# Altium PCB PCB1.PcbDoc
Units mm, origin at the board's own origin, x right, y up, seen from the top; angles counter-clockwise.
Board outline 51.51 x 80.71 mm, 2 copper layers (Component Side, Bottom Layer), stack 0.325 mm thick; 55 components, 45 nets, 211 pads, 372 vias.
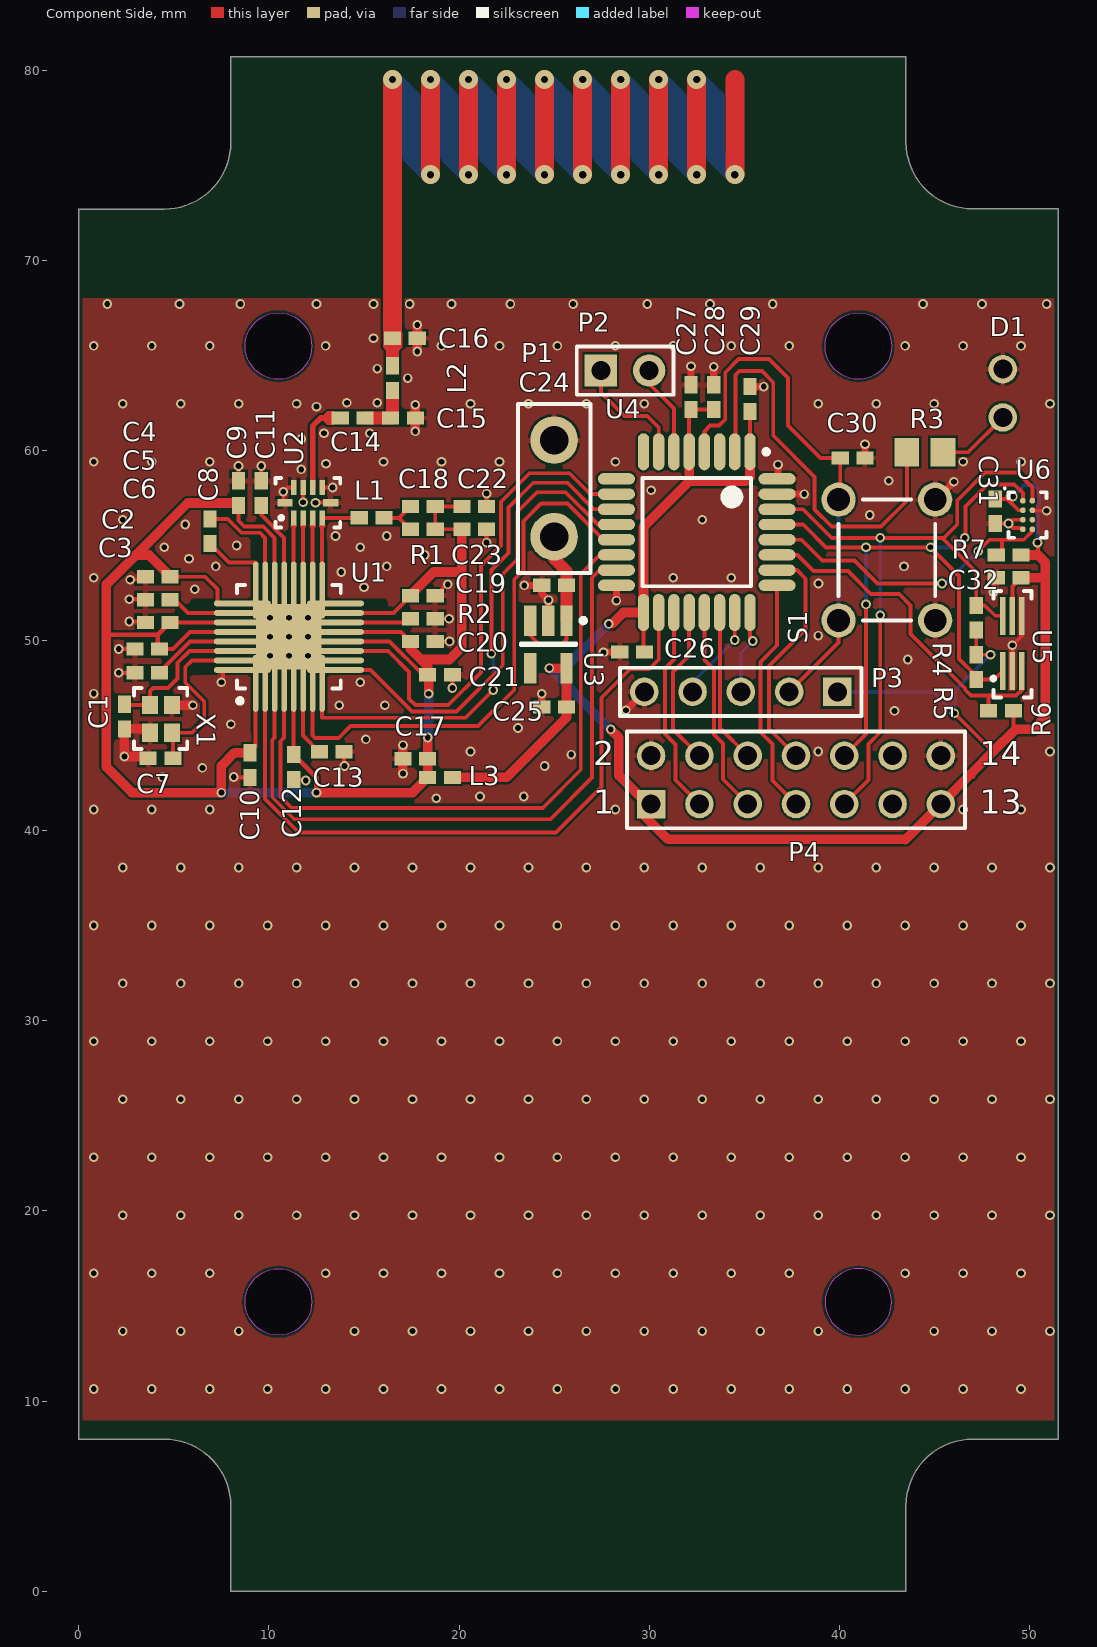
[diagram p0: Component Side view]
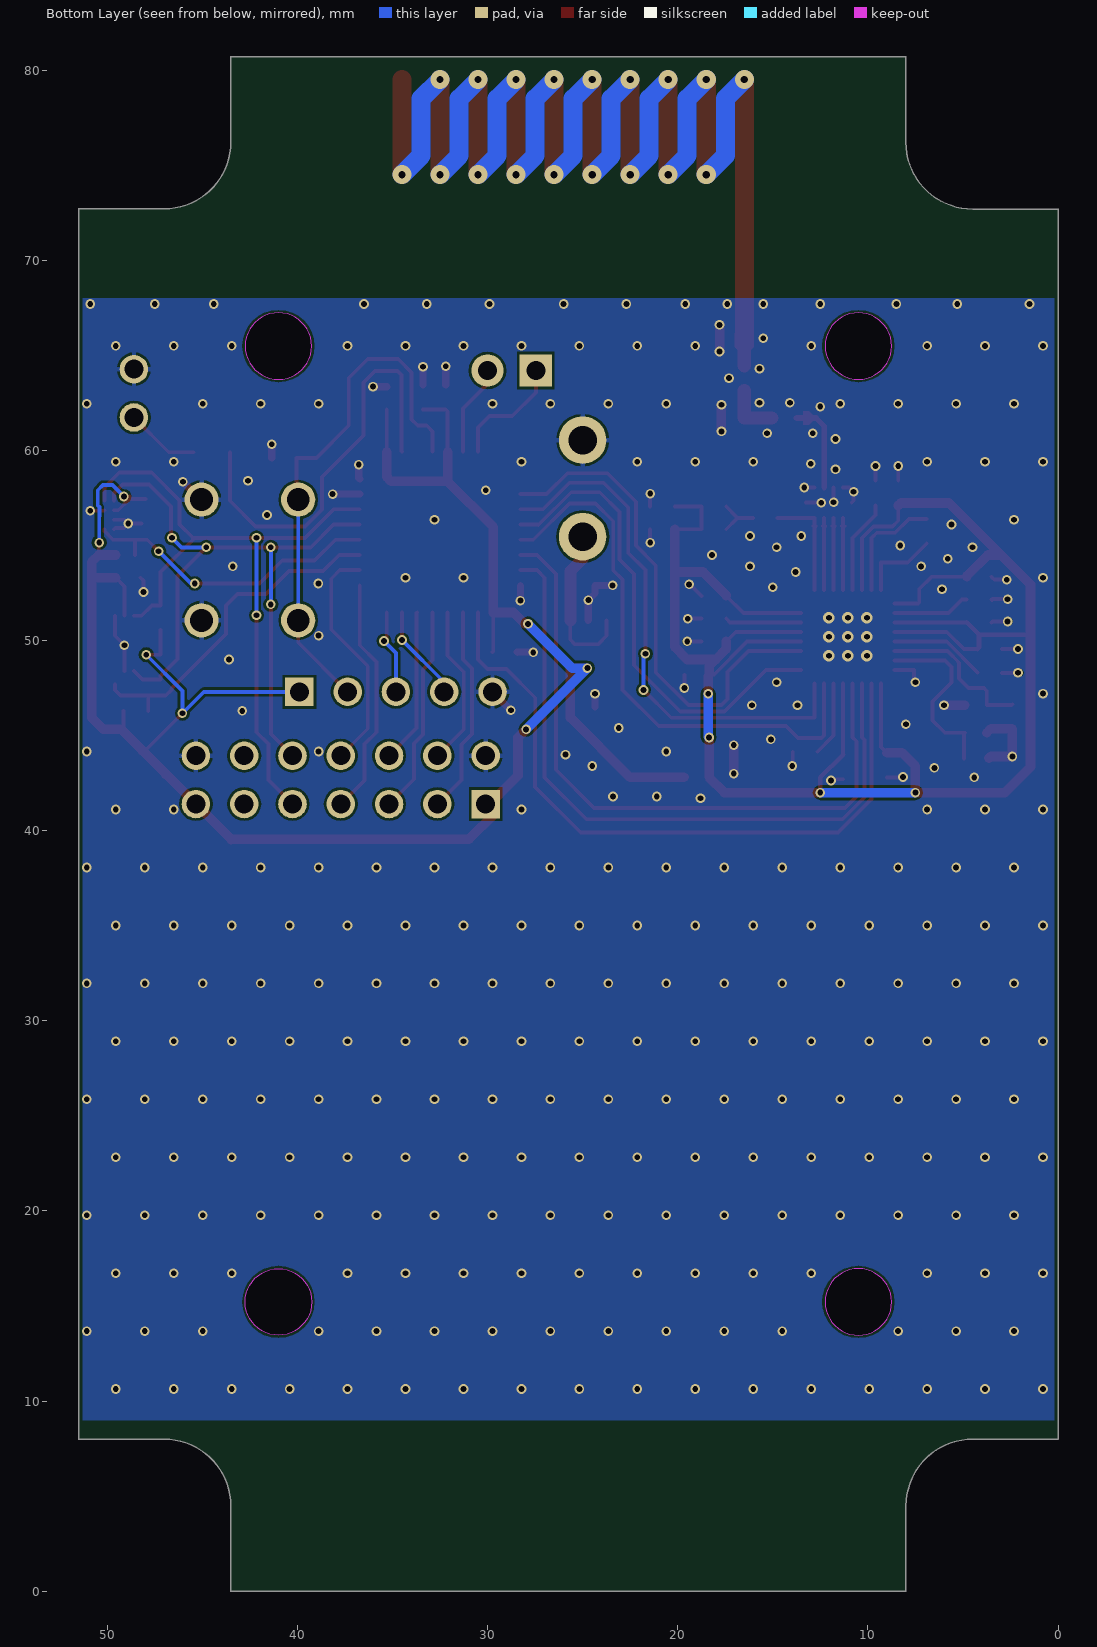
[diagram p1: Bottom Layer view, seen from below]

## Layer stack, top to bottom
Top Solder: solder mask 0.0102, Solder Resist, Dk 3.5
Component Side: signal copper 0.0356
Dielectric 1: core 0.254, FR-4, Dk 4.2
Bottom Layer: signal copper 0.0356
Solder Side: solder mask 0.0102, Solder Resist, Dk 3.5

## Board outline
7.995,0 7.995,4.49 ccw(c4.49,4.49) 4.49,7.995 0,7.995 cw(c0,8) -0.005,8 -0.005,72.685 cw(c0,72.685) 0,72.69 4.495,72.69 ccw(c4.495,76.195) 8,76.195 8,80.695 cw(c8,80.7) 8,80.705 43.5,80.705 cw(c43.5,80.7) 43.505,80.7 43.505,76.21 ccw(c47.01,76.21) 47.01,72.705 cw(c47.01,72.7) 47.015,72.7 cw(c47.01,72.7) 47.015,72.7 51.495,72.7 cw(c51.5,72.7) 51.505,72.7 51.505,8 cw(c51.5,8) 51.5,7.995 47.01,7.995 ccw(c47.01,4.49) 43.505,4.49 43.505,0 cw(c43.5,0) 43.5,-0.005 8,-0.005 cw(c8,0)
cut-out: 41,63.735 cw(c41,65.485) 39.25,65.485 cw(c41,65.485) 41,67.235 cw(c41,65.485) 42.75,65.485 cw(c41,65.485)
cut-out: 10.5,13.465 cw(c10.5,15.215) 8.75,15.215 cw(c10.5,15.215) 10.5,16.965 cw(c10.5,15.215) 12.25,15.215 cw(c10.5,15.215)
cut-out: 39.25,15.215 ccw(c41,15.215) 41,13.465 ccw(c41,15.215) 42.75,15.215 ccw(c41,15.215) 41,16.965 ccw(c41,15.215)
cut-out: 10.5,63.735 cw(c10.5,65.485) 8.75,65.485 cw(c10.5,65.485) 10.5,67.235 cw(c10.5,65.485) 12.25,65.485 cw(c10.5,65.485)

## Design rules (kind name [scope] priority, off if disabled: settings)
Clearance "Stitching GND" [IsStitchingVia and InNet('GND') vs (IsVia and (Not IsStitchingVia)) Or IsPad] p1: gap=0.254
Clearance "Stitching No Net" [IsStitchingVia and InNet('No Net') vs (IsVia and (Not IsStitchingVia)) Or IsPad] p2: gap=0.254
Clearance [All] p3: gap=0.127
HoleSize [All] p1: absolutevalues=TRUE maxlimit=2.54 minlimit=0.305 maxpercent=80.000 minpercent=20.000
MinimumSolderMaskSliver [All] p1: minsoldermaskwidth=0
NetAntennae NetAntennae_1 [InNet('NetC32_2')] p1: netantennaetolerance=900
NetAntennae [All] p2: netantennaetolerance=0
PlaneConnect [All] p1: planeconnectstyle=Relief reliefexpansion=0.508 reliefentries=4 reliefconductorwidth=0.305 reliefairgap=0.127
PolygonConnect PolygonConnect_2 [(IsVia AND InNet('GND'))] p1: connectstyle=Direct reliefconductorwidth=0.254 reliefentries=4 polygonreliefangle="90 Angle" airgapwidth=0.254
PolygonConnect PolygonConnect_1 [(InNet('GND') AND InComponent('U5'))] p2: connectstyle=Direct reliefconductorwidth=0.254 reliefentries=4 polygonreliefangle="90 Angle" airgapwidth=0.254
PolygonConnect [All] p3: connectstyle=Relief reliefconductorwidth=0.254 reliefentries=4 polygonreliefangle="90 Angle" airgapwidth=0.127
RoomDefinition RF [InComponentClass('RF')] p1: confinementstyle=ConfineIn formatcopy=TRUE lockcomponents=FALSE outline 0.2,37.6 23.425,37.6 23.425,66.8 0.2,66.8
RoomDefinition MCU [InComponentClass('MCU')] p2: confinementstyle=ConfineIn formatcopy=TRUE lockcomponents=FALSE outline 22.5,39.7 51.6,39.7 51.6,68.7 22.5,68.7
RoutingVias [All] p1: holewidth=0.381 width=0.635 viastyle="Through Hole" minholewidth=0.305 minwidth=0.508 maxholewidth=0.508 maxwidth=1.016
SolderMaskExpansion [All] p1: expansion=0.1
UnpouredPolygon [All] p1: allowunpoured=FALSE
Width [All] p1: maxlimit=1.016 minlimit=0.127 preferedwidth=0.203
25 further rules are at their usual default settings.

## Classes and differential pairs
component class MCU: C24 C25 C26 C27 C28 C29 C30 C31 C32 D1 P1 P2 P3 P4 R3 R4 R5 R6 R7 S1 U3 U4 U5 U6
component class RF: C1 C2 C3 C4 C5 C6 C7 C8 C9 C10 C11 C12 C13 C14 C15 C16 C17 C18 C19 C20 C21 C22 C23 L1 L2 L3 R1 R2 U1 U2 X1

## Components (designator, comment, footprint, x,y, rotation, side; value= is the part's Value field where it differs from the comment)
C1 "Cap" 0402_ipc 2.4,46 r90 top (schematic designator C10)
C2 "Cap" 0402_ipc 3.6,49.55 r180 top (schematic designator C16)
C3 "Cap" 0402_ipc 3.6,48.3 r0 top (schematic designator C24)
C4 "Cap" 0402_ipc 4.15,53.35 r180 top (schematic designator C18)
C5 "Cap" 0402_ipc 4.15,52.15 r0 top (schematic designator C23)
C6 "Cap" 0402_ipc 4.15,50.95 r180 top (schematic designator C17)
C7 "Cap" 0402_ipc 4.3,43.8 r0 top (schematic designator C20)
C8 "Cap" 0402_ipc 6.9,55.75 r90 top (schematic designator C26)
C9 "Cap" 0402_ipc 8.4,57.75 r90 top (schematic designator C19)
C10 "Cap" 0402_ipc 9,43.45 r270 top (schematic designator C15)
C11 "Cap" 0402_ipc 9.6,57.75 r270 top (schematic designator C25)
C12 "Cap" 0402_ipc 11.3,43.35 r270 top
C13 "Cap" 0402_ipc 13.3,44.15 r180 top (schematic designator C22)
C14 "Cap" 0402_ipc 14.4,61.7 r180 top (schematic designator C30)
C15 "Cap" 0402_ipc 17.05,61.7 r180 top (schematic designator C31)
C16 "Cap" 0402_ipc 17.15,65.9 r180 top (schematic designator C32)
C17 "Cap" 0402_ipc 17.7,43.775 r0 top (schematic designator C21)
C18 "Cap" 0402_ipc 18.1,57.05 r180 top (schematic designator C27)
C19 "Cap" 0402_ipc 18.1,52.35 r0 top (schematic designator C14)
C20 "Cap" 0402_ipc 18.1,49.95 r0 top (schematic designator C13)
C21 "Cap" 0402_ipc 19,48.2 r0 top (schematic designator C11)
C22 "Cap" 0402_ipc 20.8,57.05 r180 top (schematic designator C28)
C23 "Cap" 0402_ipc 20.8,55.85 r180 top (schematic designator C29)
C24 "Cap" 0402_ipc 25,52.9 r0 top (schematic designator C1)
C25 "Cap" 0402_ipc 25,46.5 r0 top (schematic designator C2)
C26 "Cap" 0402_ipc 29.1,49.4 r0 top (schematic designator C4)
C27 "Cap" 0402_ipc 32.2,62.8 r270 top (schematic designator C5)
C28 "Cap" 0402_ipc 33.4,62.8 r270 top (schematic designator C6)
C29 "Cap" 0402_ipc 35.3,62.7 r270 top (schematic designator C3)
C30 "Cap" 0402_ipc 40.7,59.6 r180 top (schematic designator C7)
C31 "Cap" 0402_ipc 48.2,56.8 r90 top (schematic designator C8)
C32 "Cap" 0402_ipc 48.9,53.3 r0 top (schematic designator C9)
D1 "LED" LED_5MM 48.6,63 r90 top
L1 "Inductor" 0402_ipc 15.4,56.45 r180 top (schematic designator L2)
L2 "Inductor" 0402_ipc 16.5,63.8 r90 top (schematic designator L3)
L3 "Ferrite" 0402_ipc 19,42.8 r180 top (schematic designator L1)
P1 "Battery header 2" HDR1X2 25,58 r90 top
P2 "Header 2x1" HDR1X2_100mil 30,64.2 r0 top (schematic designator P4)
P3 "Header 5" HDR1X5 39.9,47.3 r180 top
P4 "Header 7X2" HDR2X7 30.1,41.4 r0 top (schematic designator P2)
R1 "Res" 0402_ipc 18.1,55.85 r0 top (schematic designator R7)
R2 "Res" 0402_ipc 18.1,51.15 r180 top (schematic designator R6)
R3 "Res" 0805_IPC 44.5,59.9 r0 top (schematic designator R1)
R4 "Res" 0402_ipc 47.2,51.2 r270 top (schematic designator R3)
R5 "Res" 0402_ipc 47.2,48.6 r90 top (schematic designator R2)
R6 "Res" 0402_ipc 48.5,46.3 r0 top (schematic designator R5)
R7 "Res" 0402_ipc 48.9,54.5 r0 top (schematic designator R4)
S1 "SW-PB" SW_PB 42.5,53.6 r90 top
U1 "CC1120" CC1120_VQFN32 11.05,50.2 r90 top (schematic designator U5)
U2 "0900PC15J0013" 0900PC15J0013 10.75,57.25 r0 top (schematic designator U6)
U3 "LT1761MPS5-3.3#TRMPBF" LT-S5-5-TSOT-23_M 24.7,49.8 r270 top (schematic designator U1)
U4 "STM32L051K6T6" STM-LQFP32_M 32.5,55.7 r270 top (schematic designator U2)
U5 "TMP112" TMP112 48.6,51.3 r0 top (schematic designator U4)
U6 "HDC1000" HDC1000 49.9,56.6 r0 top (schematic designator U3)
X1 "FA-128" FA-128 4.9,46.6 r270 top

## Footprints (in the part's own frame and the unit in brackets; to place one, negate y for a bottom-side part, rotate by r counter-clockwise, add the part's x,y. Pads: shape width x height; smd on the part's side, far side on the other; paste and mask are expansions set on the pad)
0402_ipc [mm] "Chip Capacitor, Body 1.0x0.5mm"
  rect 0.9x0.7 smd: 1(-0.65,0) 2(0.65,0)
  body extent -0.55,-0.3 0.55,0.3, height 1.3
0805_IPC [mm] "Chip Capacitor, Body 1.0x0.5mm"
  rect 1.3x1.5 smd: 1(-0.95,0) 2(0.95,0)
  body extent -1,-0.7 1,0.7, height 1.3
0900PC15J0013 [mm] "IPC CC1120"
  rect 0.3x0.8 smd: 1(0.55,-0.8) 2(1.05,-0.8) 3(1.55,-0.8) 4(2.05,-0.8) 6(2.05,0.8) 7(1.55,0.8) 8(1.05,0.8) 9(0.55,0.8)
  rect 0.8x0.4 smd: 5(2.5,0) 10(0.1,0)
  silkscreen extent -0.4,-1.3 3,1.3, body extent 0.3,-0.67 2.3,0.67, height 1
CC1120_VQFN32 [mm] "QFN, 32-Leads, Body 5,00x5,00mm, Pitch 0,50mm, Thermal Pad 3,45x3,45mm, IPC Low Density"
  oval 3x0.3 smd: 1(-2.45,1.75) 2(-2.45,1.25) 3(-2.45,0.75) 4(-2.45,0.25) 5(-2.45,-0.25) 6(-2.45,-0.75) 7(-2.45,-1.25) 8(-2.45,-1.75) 17(2.45,-1.75) 18(2.45,-1.25) 19(2.45,-0.75) 20(2.45,-0.25) 21(2.45,0.25) 22(2.45,0.75) 23(2.45,1.25) 24(2.45,1.75)
  oval 0.3x3 smd: 9(-1.75,-2.45) 10(-1.25,-2.45) 11(-0.75,-2.45) 12(-0.25,-2.45) 13(0.25,-2.45) 14(0.75,-2.45) 15(1.25,-2.45) 16(1.75,-2.45) 25(1.75,2.45) 26(1.25,2.45) 27(0.75,2.45) 28(0.25,2.45) 29(-0.25,2.45) 30(-0.75,2.45) 31(-1.25,2.45) 32(-1.75,2.45)
  rect 3.45x3.45 smd: PAD(0,0)
  silkscreen extent -3.5,-2.73 2.73,2.73, body extent -2.58,-2.57 2.57,2.58, height 1
FA-128 [mm] "Quartz FA-128 Epson"
  rect 0.95x0.85 smd: 1(0,-1.15) 2(1.45,-1.15) 3(1.45,0) 4(0,0)
  silkscreen extent -0.9,-2 2.3,0.8, body extent -0.27,-1.37 1.73,0.23, height 0.5
HDC1000 [mm] "BGA, 8-Leads, Body 1,59x2,04mmx0,68mm, Pitch 0,50mm"
  round 0.305 smd mask+0.05: A1(-0.25,0.75) A2(0.25,0.75) B1(-0.25,0.25) B2(0.25,0.25) C1(-0.25,-0.25) C2(0.25,-0.25) D1(-0.25,-0.75) D2(0.25,-0.75)
  silkscreen extent -1.25,-1.2 1,1.45, body extent -0.79,-1.02 0.8,1.02, height 0.68
HDR1X2 [mm] "Connector; Header; 2 Position"
  round 2.5 hole 1.5: 1(-2.54,0) 2(2.54,0)
  silkscreen extent -4.44,-1.91 4.44,1.91
HDR1X2_100mil [mm] "Connector; Header; 2 Position"
  rect 1.7x1.7 hole 1: 1(-2.54,0)
  round 1.7 hole 1: 2(0,0)
  silkscreen extent -3.81,-1.27 1.27,1.27
HDR1X5 [mm] "Connector; Header; 5 Position"
  rect 1.5x1.5 hole 1: 1(0,0)
  round 1.5 hole 1: 2(2.54,0) 3(5.08,0) 4(7.62,0) 5(10.16,0)
  silkscreen extent -1.27,-1.27 11.43,1.27
HDR2X7 [mm] "Connector; Header; 7x2 Position"
  rect 1.5x1.5 hole 1: 1(0,0)
  round 1.5 hole 1: 2(0,2.54) 3(2.54,0) 4(2.54,2.54) 5(5.08,0) 6(5.08,2.54) 7(7.62,0) 8(7.62,2.54) 9(10.16,0) 10(10.16,2.54) 11(12.7,0) 12(12.7,2.54) 13(15.24,0) 14(15.24,2.54)
  silkscreen extent -1.27,-1.27 16.51,3.81
LED_5MM [mm]
  round 1.5 hole 1: 1(-1.27,0) 2(1.27,0)
LT-S5-5-TSOT-23_M [mm] "SOT23, 5-Leads, Body 2.90x1.63mm, Pitch 0.95mm, IPC Low Density"
  rect 1.6x0.65 smd: 1(-1.25,0.95) 2(-1.25,0) 3(-1.25,-0.95) 4(1.25,-0.95) 5(1.25,0.95)
  silkscreen extent -1.37,-1.45 0.05,1.95, body extent -0.87,-1.45 0.87,1.45, height 1
STM-LQFP32_M [mm] "QFP, 32-Leads, Body 7x7mm, Pitch 0.8mm, IPC Low Density"
  oval 1.95x0.6 smd: 1(-4.225,2.8) 2(-4.225,2) 3(-4.225,1.2) 4(-4.225,0.4) 5(-4.225,-0.4) 6(-4.225,-1.2) 7(-4.225,-2) 8(-4.225,-2.8) 17(4.225,-2.8) 18(4.225,-2) 19(4.225,-1.2) 20(4.225,-0.4) 21(4.225,0.4) 22(4.225,1.2) 23(4.225,2) 24(4.225,2.8)
  oval 0.6x1.95 smd: 9(-2.8,-4.225) 10(-2,-4.225) 11(-1.2,-4.225) 12(-0.4,-4.225) 13(0.4,-4.225) 14(1.2,-4.225) 15(2,-4.225) 16(2.8,-4.225) 25(2.8,4.225) 26(2,4.225) 27(1.2,4.225) 28(0.4,4.225) 29(-0.4,4.225) 30(-1.2,4.225) 31(-2,4.225) 32(-2.8,4.225)
  silkscreen extent -4.35,-2.85 2.85,3.78, body extent -3.5,-3.5 3.5,3.5, height 1.6
SW_PB [mm]
  round 1.8 hole 1.2: 1(-2.54,2.54) 1(3.81,2.54) 2(-2.54,-2.54) 2(3.81,-2.54)
  silkscreen extent -2.54,-2.54 3.81,2.54
TMP112 [mm]
  rect 0.3x2 smd mask+0.05: 1(0,-2.9) 2(0.5,-2.9) 3(1,-2.9) 4(1,0) 5(0.5,0) 6(0,0)
  silkscreen extent -0.6,-4.3 1.5,1.3, body extent -0.15,-2.3 1.15,-0.6, height 0.7

## Part data
C1 C2 C3 C4 C5 C6 C7 C8 C9 C10 C11 C12 C13 C14 C15 C16 C17 C18 C19 C20 C21 C22 C23 C24 C25 C26 C27 C28 C29 C30 C31 C32: "Capacitor"
D1: "Typical INFRARED GaAs LED"
L3: library part Inductor, "Inductor"
P3: "Header, 5-Pin"
P4: "Header, 7-Pin, Dual row"
R1 R2 R3 R4 R5 R6 R7: "Resistor"
S1: "Switch"
U3: library part CMP-0476-01317-1, "100 mA, Low Noise, LDO Micropower Regulator, 1.8 to 20 V Vin, 3.3 V Vout, 5-pin SOT23 (S5-5), -55 to 125 degC, Pb-Free, Mini Tape and Reel"
U4: library part CMP-1341-00001-1, "Access Line Ultra-Low-Power ADC, 32 Bit MCU ARM, 32 kB Flash, 8 kB SRAM, 2 kB EEPROM, -40 to 85 degC, 32-Pin LQFP, Tray"
X1: "Quartz 32 MHz"

## Via types
v1: diameter 0.508, hole 0.305, Component Side to Bottom Layer, tented both sides, 345 vias
v2: diameter 1, hole 0.38, Component Side to Bottom Layer, tented both sides, 18 vias
v3: diameter 0.61, hole 0.305, Component Side to Bottom Layer, tented both sides, 9 vias

## Nets (pads, with @x,y where several pads share a name; then routed paths per layer and width w, separated by ;. In a path a pad name is that pad's centre, name@x,y a point inside that pad or via, vN(x,y) a via of type N, cw(c..) or ccw(c..) an arc to the next point about the centre after c; other vN are vias at no path point)
+3V3: C25.2 C26.2 C27.2 C28.2 C29.2 C31.2 C32.2 L3.1 P3.1 P4.1 P4.13 R4.2 R5.2 R6.2 R7.2 U3.5 U4.1 U4.5 U4.17 U5.5 U6.B1 | length 110.1
  Component Side w0.203: U4.17 29.7,49.45 C26.2 ; U4.5 32.1,62.05 C27.2 C28.2 ; U4.1 C29.2@35.3,62.15 ; v1(46.05,46.175) 48.02,44.205 48.145,44.205 ; 46.911,42.971 47.05,42.833 ; R4.2 R5.2 v1(47.95,49.25) ; C31.2@48,57.45 C31.2 48.823,57.45 ; U5.5 49.1,52.85 C32.2 ; v1(49.127,57.578) 48.823,57.578 48.823,57.45 ; 49.15,45.375 R6.2 ; U6.B1 49.423,56.85 48.823,57.45 ; v1(50.425,55.15) 50.45,55.125 50.45,54.5
  Component Side w0.508: L3.1 22.5,42.8 25.65,45.95 U3.5 v1(24.75,48.55) ; v1(27.875,50.875) 28.038,50.875 28.638,51.475 U4.17 29.7,55.975 32.1,58.375 ; v1(27.975,45.325) 28.4,44.9 28.4,42.9 29.611,41.689 29.611,40.911 30.972,39.55 43.475,39.55 43.475,39.535 P4.13 46.911,42.971 48.145,44.205 49.265,45.325 50.2,45.325 50.825,45.95 50.825,53.325 ; U4.5 32.1,58.375 ; U4.1 35.3,58.6 35.075,58.375 32.1,58.375 ; C32.2 50.8,53.3 50.825,53.325 ; R7.2 50.45,54.5 50.825,54.125 50.825,53.325
  Bottom Layer w0.203: P3.1 44.925,47.3 v1(46.05,46.175) 46.05,47.35 v1(47.95,49.25) ; v1(49.127,57.578) 49.13,57.575 49.73,58.175 50.225,58.175 50.5,57.9 50.5,57.107 50.417,57.025 50.417,56.543 50.425,56.535 v1(50.425,55.15)
  Bottom Layer w0.508: v1(27.875,50.875) 25.55,48.55 v1(24.75,48.55) v1(27.975,45.325)
+3V3RF: C2.1 C4.1 C6.1 C9.1 C10.1 C12.1 C17.2 C18.1 C19.1 C20.1 C21.1 C22.2 C23.2 L3.2 R1.2 U1.1 U1.5 U1.12 U1.13 U1.15 U1.22 U1.25 U1.27 U1.28 | length 112.4
  Component Side w0.203: C2.1 4.95,49.55 5.85,50.45 U1.28 ; C6.1 U1.27 ; C4.1 6.65,53.35 7.3,52.7 7.3,52 7.35,51.95 U1.25 ; C9.1 8.4,56.3 8.7,56 9.7,56 10.3,55.4 U1.22 ; C10.1 9.3,44.4 U1.1 ; C12.1 U1.5 ; U1.12 16.35,49.95 C21.1@18.1,48.2 ; U1.13 16.95,50.45 C20.1 ; U1.15 16.55,51.45 C19.1 ; C23.2 R1.2 C18.1 C22.2
  Component Side w0.254: 1.5,50.3 4.15,50.3 ; C2.1 4.15,49.65 4.15,50.3 ; C6.1 4.15,50.3 ; C12.1 12.5,42.8 v1(12.5,42)
  Component Side w0.508: C4.1 4.8,53.389 3.689,54.5 3,54.5 ; C9.1 8.269,57.231 5.731,57.231 3,54.5 ; C10.1 8.2,44.1 7.5,43.4 v1(7.5,42) 2.8,42 1.45,43.35 1.45,52.95 3,54.5 ; v1(12.5,42) 17.55,42 L3.2 v1(18.35,44.9) ; C20.1 17.45,49.55 18,49 ; C19.1 17.45,52.389 18.661,53.6 20.15,53.6 ; v1(18.4,47.2) 18.4,48.15 C21.1 18.35,48.65 18,49 ; C23.2 20.15,53.6 ; 18,49 19.5,49 20.15,49.65 20.15,53.6
  Bottom Layer w0.508: v1(7.5,42) v1(12.5,42) ; v1(18.35,44.9) 18.4,44.95 v1(18.4,47.2)
+VBAT: C24.2 P1.1 U3.1 U3.3 | length 8.7
  Component Side w0.203: U3.3 23.75,50.25 24.2,49.8 25.4,49.8 25.65,50.05 U3.1
  Component Side w0.635: P1.1 25,54.3 25.65,53.65 C24.2 U3.1
ADC_IN0: P4.7 U4.25 | length 12.6
  Component Side w0.203: U4.25 36.725,49.75 35.849,48.874 35.849,45.176 36.475,44.55 36.475,42.645 P4.7
GND: C1.1 C2.2 C3.1 C4.2 C5.1 C6.2 C7.1 C9.2 C10.2 C11.1 C12.2 C13.1 C15.1 C16.1 C17.1 C19.2 C20.2 C21.2 C22.1 C23.1 C24.1 C25.1 C26.1 C27.1 C28.1 C29.1 C30.1 C31.1 C32.1 D1.2 P1.2 P3.5 P4.2 P4.14 R2.1 S1.2 U1.32 U1.PAD U2.5 U2.6 U2.8 U2.9 U2.10 U3.2 U4.16 U4.31 U4.32 U5.2 U5.4 U6.B2 U6.C1 U6.D1 X1.2 X1.4 | length 48.3
  Component Side w0.203: v1(2.1,48.302) 2.102,48.3 C3.1 ; v1(2.1,49.552) 2.103,49.55 C2.2 ; v1(2.65,51.002) 2.653,51 3.45,51 C6.2 ; v1(2.65,52.175) 3.425,52.175 3.475,52.125 C5.1 ; v1(2.7,53.2) 3.35,53.2 C4.2 ; v1(7.5,47.8) 7.577,47.877 7.577,48.45 U1.32 ; v1(8.15,42.825) 8.175,42.8 C10.2 ; C9.2 v1(8.4,59.175) ; C11.1 v1(9.6,59.175) ; U2.10 10.75,57.35 v1(10.75,57.825) 10.975,58.05 U2.9 ; C12.2 12,42.7 v1(11.941,42.641) ; v1(11.8,57.275) U2.8 ; v1(12.45,57.25) U2.5 ; U2.6 v1(13.35,58.05) ; C13.1 13.95,43.425 v1(13.975,43.4) ; C20.2 19.499,49.95 v1(19.501,49.952) ; R2.1 v1(19.475,51.15) ; C19.2 19.4,53 v1(19.401,52.953) v1(19.401,52.953) ; v1(19.65,47.5) C21.2 ; v1(21.45,55.15) C23.1 ; C22.1 v1(21.45,57.725) ; v1(48.1,52.55) 48.1,53.15 C32.1 ; C31.1 v1(48.9,56.15) ; U5.2 v1(49.1,49.75) 49.6,50.25 U5.4 ; U6.D1 49.575,55.925 49.125,55.925 v1(48.9,56.15) ; U6.C1 49.1,56.35 v1(48.9,56.15) ; U6.B2 50.175,56.825 v1(50.9,56.825)
  Component Side w0.381: v1(23.425,52.9) C24.1 24.35,52.475 v1(24.7,52.125) U3.2 ; C25.1 v1(24.35,47.2) ; v1@27.625,49.4 C26.1 C26.1@28.425,49.375 ; v1(28.275,52.1) U4.16 ; v1(28.775,46.335) P3.5 ; C27.1 v1(32.2,64.425) ; C28.1 v1(33.4,64.4) ; C29.1 36.024,63.35 v1(36.027,63.353) ; U4.31 v1(38.15,57.7) ; U4.32 36.775,58.55 v1(36.775,59.25) ; C30.1 v1(41.35,60.325) ; S1.2@45.04,57.41 45.085,57.41 v1(46.025,58.35)
  Component Side w0.5: C7.1 3.55,43.9 v1(2.4,43.9) C1.1 3.55,45.35 X1.2 ; X1.4 v1(6,46.6) ; v1(17.05,43) C17.1 v1(17.05,44.5) ; v1(17.7,61) C15.1 v1(17.7,62.4) ; v1(17.8,65.2) C16.1 v1(17.8,66.6)
  Bottom Layer w0.203: v1@2.048,48.302 v1(2.1,48.302) ; v1@2.077,49.552 v1(2.1,49.552) ; v1@2.623,51.002 v1(2.65,51.002) ; v1(19.501,49.952) v1@19.523,49.952
  other v1: 0.788,10.632 3.836,10.632 6.884,10.632 9.932,10.632 12.98,10.632 16.028,10.632 19.076,10.632 22.124,10.632 25.172,10.632 28.22,10.632 31.268,10.632 34.316,10.632 37.364,10.632 40.412,10.632 43.46,10.632 46.508,10.632 49.556,10.632 2.312,13.68 5.36,13.68 8.408,13.68 14.504,13.68 17.552,13.68 20.6,13.68 23.648,13.68 26.696,13.68 29.744,13.68 32.792,13.68 35.84,13.68 38.888,13.68 44.984,13.68 48.032,13.68 51.08,13.68 0.788,16.728 3.836,16.728 6.884,16.728 12.98,16.728 16.028,16.728 19.076,16.728 22.124,16.728 25.172,16.728 28.22,16.728 31.268,16.728 34.316,16.728 37.364,16.728 43.46,16.728 46.508,16.728 49.556,16.728 2.312,19.776 5.36,19.776 8.408,19.776 11.456,19.776 14.504,19.776 17.552,19.776 20.6,19.776 23.648,19.776 26.696,19.776 29.744,19.776 32.792,19.776 35.84,19.776 38.888,19.776 41.936,19.776 44.984,19.776 48.032,19.776 51.08,19.776 0.788,22.824 3.836,22.824 6.884,22.824 9.932,22.824 12.98,22.824 16.028,22.824 19.076,22.824 22.124,22.824 25.172,22.824 28.22,22.824 31.268,22.824 34.316,22.824 37.364,22.824 40.412,22.824 43.46,22.824 46.508,22.824 49.556,22.824 2.312,25.872 5.36,25.872 8.408,25.872 11.456,25.872 14.504,25.872 17.552,25.872 20.6,25.872 23.648,25.872 26.696,25.872 29.744,25.872 32.792,25.872 35.84,25.872 38.888,25.872 41.936,25.872 44.984,25.872 48.032,25.872 51.08,25.872 0.788,28.92 3.836,28.92 6.884,28.92 9.932,28.92 12.98,28.92 16.028,28.92 19.076,28.92 22.124,28.92 25.172,28.92 28.22,28.92 31.268,28.92 34.316,28.92 37.364,28.92 40.412,28.92 43.46,28.92 46.508,28.92 49.556,28.92 2.312,31.968 5.36,31.968 8.408,31.968 11.456,31.968 14.504,31.968 17.552,31.968 20.6,31.968 23.648,31.968 26.696,31.968 29.744,31.968 32.792,31.968 35.84,31.968 38.888,31.968 41.936,31.968 44.984,31.968 48.032,31.968 51.08,31.968 0.788,35.016 3.836,35.016 6.884,35.016 9.932,35.016 12.98,35.016 16.028,35.016 19.076,35.016 22.124,35.016 25.172,35.016 28.22,35.016 31.268,35.016 34.316,35.016 37.364,35.016 40.412,35.016 43.46,35.016 46.508,35.016 49.556,35.016 2.312,38.064 5.36,38.064 8.408,38.064 11.456,38.064 14.504,38.064 17.552,38.064 20.6,38.064 23.648,38.064 26.696,38.064 29.744,38.064 32.792,38.064 35.84,38.064 38.888,38.064 41.936,38.064 44.984,38.064 48.032,38.064 51.08,38.064 0.788,41.112 3.836,41.112 6.884,41.112 28.22,41.112 46.508,41.112 49.556,41.112 18.8,41.7 21.1,41.8 23.4,41.8 4.4,42.8 6.5,43.3 24.5,43.4 25.9,44 20.6,44.16 38.888,44.16 51.08,44.16 15.1,44.8 23.1,45.4 8,45.6 42.9,46.3 13.7,46.6 16.1,46.6 0.788,47.208 14.8,47.8 43.6,49 27.6,49.375 38.888,50.256 6.1,52.7 15,52.8 38.9,53 0.788,53.304 31.268,53.304 34.316,53.304 13.8,53.6 7.2,53.9 16.2,53.9 43.4,53.9 5.8,54.3 18.2,54.5 4.5,54.9 14.8,54.9 8.3,55 13.5,55.5 16.2,55.5 5.6,56.1 2.312,56.352 32.792,56.352 41.6,56.6 30.1,57.9 42.6,58.4 11.7,59 13,59.3 0.788,59.4 3.836,59.4 6.884,59.4 16.028,59.4 19.076,59.4 22.124,59.4 28.22,59.4 46.508,59.4 49.556,59.4 11.7,60.6 12.9,60.9 15.3,60.9 12.5,62.3 2.312,62.448 5.36,62.448 8.408,62.448 11.456,62.448 20.6,62.448 23.648,62.448 26.696,62.448 29.744,62.448 38.888,62.448 41.936,62.448 44.984,62.448 51.08,62.448 14.1,62.5 15.7,62.5 17.3,63.8 15.7,64.3 0.788,65.496 3.836,65.496 6.884,65.496 12.98,65.496 19.076,65.496 22.124,65.496 25.172,65.496 28.22,65.496 31.268,65.496 34.316,65.496 37.364,65.496 43.46,65.496 46.508,65.496 49.556,65.496 15.5,65.9 1.5,67.7 5.3,67.7 8.5,67.7 12.5,67.7 15.5,67.7 17.4,67.7 19.6,67.7 22.7,67.7 26,67.7 29.9,67.7 33.2,67.7 36.5,67.7 44.4,67.7 47.5,67.7 50.9,67.7
  other v3: 10.05,49.2 11.05,49.2 12.05,49.2 10.05,50.2 11.05,50.2 12.05,50.2 10.05,51.2 11.05,51.2 12.05,51.2
HDC_DRDYN: R7.1 U4.28 U6.D2 | length 16.4
  Component Side w0.203: U4.28 38,55.3 39.1,54.2 40.8,54.2 42,53 v1(45.4,53) ; v1(47.3,54.7) 47.9,55.3 49.7,55.3 50.15,55.75 U6.D2 ; R7.1@48.55,54.5 48.55,55.25
  Bottom Layer w0.203: v1(45.4,53) 45.6,53 v1(47.3,54.7)
I2C_SCL: P4.10 R5.1 U4.29 U5.1 U6.A1 | length 37.3
  Component Side w0.203: U4.29 38.1,56.1 39.3,54.9 v1(41.4,54.9) v1(44.8,54.9) 46.3,53.4 46.3,49.027 47.2,48.127 R5.1 48.15,47.95 U5.1 ; P4.10 41.4,45.08 v1(41.4,51.9) ; v1(46.6,55.4) 46.642,55.442 46.642,57.042 47.8,58.2 49.2,58.2 49.65,57.75 U6.A1
  Bottom Layer w0.203: v1(41.4,51.9) v1(41.4,54.9) ; v1(44.8,54.9) 46.1,54.9 v1(46.6,55.4)
I2C_SDA: P4.9 R4.1 U4.30 U5.6 U6.A2 | length 37.9
  Component Side w0.203: U4.30 38.1,56.9 39.6,55.4 v1(42.15,55.4) 45.5,55.4 ; P4.9 41.525,42.665 41.525,44.55 42.15,45.175 v1(42.15,51.325) ; U5.6 48.2,51.3 47.65,51.85 R4.1 47.2,53.6 45.45,55.35 46.2,56.1 46.2,57.367 47.663,58.83 49.37,58.83 50.15,58.05 U6.A2
  Bottom Layer w0.203: v1(42.15,51.325) v1(42.15,55.4)
NetC1_2: C1.2 U1.30 X1.1 | length 8.3
  Component Side w0.203: C1.2 2.45,46.6 X1.1 3.75,47.35 3.9,47.5 4.7,47.5 5.2,48 5.2,48.833 5.354,48.987 5.663,49.296 5.817,49.45 U1.30
NetC3_2: C3.2 U1.29 | length 5
  Component Side w0.203: C3.2@4.225,48.325 5.85,49.95 U1.29
NetC5_2: C5.2 U1.26 | length 4.1
  Component Side w0.203: C5.2 5.05,52.15 5.75,51.45 U1.26
NetC7_2: C7.2 U1.31 X1.3 | length 9.7
  Component Side w0.203: C7.2 4.95,45.1 X1.3 5.95,45.15 6.6,45.8 6.6,46.8 5.6,47.8 5.6,48.6 5.95,48.95 U1.31
NetC8_1: C8.1 U1.24 | length 4.3
  Component Side w0.203: C8.1 7.9,54.1 9.3,54.1 U1.24
NetC8_2: C8.2 U1.23 | length 6.1
  Component Side w0.203: C8.2 7.833,56.4 8.563,55.67 9.53,55.67 9.8,55.4 U1.23
NetC11_2: C11.2 U1.21 | length 4.9
  Component Side w0.203: C11.2 9.6,56.6 10.8,55.4 U1.21
NetC13_2: C13.2 U1.6 | length 4
  Component Side w0.203: U1.6 11.8,45 C13.2
NetC14_1: C14.1 C15.2 L2.1 | length 2.8
  Component Side w0.7: C14.1 C15.2 ; C15.2@16.5,61.7 L2.1
NetC14_2: C14.2 U2.7 | length 4.9
  Component Side w0.3: U2.7 12.3,61.275 12.725,61.7 C14.2
NetC16_2: C16.2 L2.2 | length 112.5
  Component Side w0.7: L2.2 C16.2
  Component Side w1: C16.2 v2(16.5,79.5) ; v2(18.5,74.5) v2(18.5,79.5) ; v2(20.5,74.5) v2(20.5,79.5) ; v2(22.5,74.5) v2(22.5,79.5) ; v2(24.5,74.5) v2(24.5,79.5) ; v2(26.5,74.5) v2(26.5,79.5) ; v2(28.5,74.5) v2(28.5,79.5) ; v2(30.5,74.5) v2(30.5,79.5) ; v2(32.5,74.5) v2(32.5,79.5) ; v2(34.5,74.5) 34.5,79.5
  Bottom Layer w1: v2(16.5,79.5) 17.5,78.5 17.5,75.5 v2(18.5,74.5) ; v2(18.5,79.5) 19.5,78.5 19.5,75.5 v2(20.5,74.5) ; v2(20.5,79.5) 21.5,78.5 21.5,75.5 v2(22.5,74.5) ; v2(22.5,79.5) 23.5,78.5 23.5,75.5 v2(24.5,74.5) ; v2(24.5,79.5) 25.5,78.5 25.5,75.5 v2(26.5,74.5) ; v2(26.5,79.5) 27.5,78.5 27.5,75.5 v2(28.5,74.5) ; v2(28.5,79.5) 29.5,78.5 29.5,75.5 v2(30.5,74.5) ; v2(30.5,79.5) 31.5,78.5 31.5,75.5 v2(32.5,74.5) ; v2(32.5,79.5) 33.5,78.5 33.5,75.5 v2(34.5,74.5)
NetC18_2: C18.2 L1.1 R1.1 | length 2.5
  Component Side w0.203: L1.1 16.85,56.45 ; R1.1 16.85,56.45 ; C18.2 16.85,56.45
NetD1_1: D1.1 R3.2 | length 3.9
  Component Side w0.203: R3.2 46.77,59.9 D1.1
NetL1_2: L1.2 U1.17 U2.4 | length 5.7
  Component Side w0.203: U1.17 U2.4 L1.2
NetP2_1: P2.1 U4.7 | length 6.2
  Component Side w0.203: P2.1 27.46,63.04 28.7,61.8 29.9,61.8 30.5,61.2 U4.7
NetP2_2: P2.2 U4.6 | length 4.8
  Component Side w0.203: P2.2 30,63.5 31.3,62.2 U4.6
NetR2_2: R2.2 U1.14 | length 4
  Component Side w0.203: U1.14 17.25,50.95 R2.2
NetR3_1: R3.1 U4.2 | length 22.3
  Component Side w0.203: U4.2 34.53,59.955 34.53,63.963 34.737,64.17 35.93,64.17 36.525,63.575 36.525,60.775 38.7,58.6 38.7,56.9 39.6,56 42.2,56 43.55,57.35 R3.1
NetU1_2: U1.2 U4.18 | length 36.5
  Component Side w0.203: U1.2 9.8,41.666 11.566,39.9 25.1,39.9 27.5,42.3 27.5,45.117 27.492,45.125 27.492,46.992 29,48.5 30,48.5 30.5,49 U4.18
NetU1_3: U1.3 U4.15 | length 36.2
  Component Side w0.203: U1.3 10.3,44.9 10.175,44.775 10.175,41.758 11.333,40.6 24.8,40.6 27,42.8 27,53.3 27.4,53.7 U4.15
NetU1_4: U1.4 U4.14 | length 35.5
  Component Side w0.203: U1.4 10.8,44.9 10.6,44.7 10.6,41.8 11.2,41.2 24.4,41.2 26.4,43.2 26.4,53.5 27.4,54.5 U4.14
NetU1_11: U1.11 U4.10 | length 26.9
  Component Side w0.203: U1.11 16.275,49.45 17.375,48.35 17.375,46.925 17.7,46.6 19.432,46.6 21.154,48.321 21.154,53.954 22.2,55 22.2,57.3 23.7,58.8 25.8,58.8 26.9,57.7 U4.10
NetU1_18: U1.18 U2.3 | length 3.8
  Component Side w0.203: U1.18 U2.3
NetU1_19: U1.19 U2.2 | length 3.8
  Component Side w0.203: U1.19 U2.2
NetU1_20: U1.20 U2.1 | length 3.8
  Component Side w0.203: U1.20 U2.1
PB3: P4.8 U4.26 | length 12.4
  Component Side w0.203: U4.26 37.775,53.7 38.225,53.25 38.225,50.575 36.3,48.65 36.3,45.36 P4.8
RESET: C30.2 P3.2 S1.1 U4.4 | length 28.3
  Component Side w0.203: U4.4 32.9,61 33.2,61.3 33.673,61.3 34,61.627 34,64.1 34.7,64.8 36.3,64.8 37.3,63.8 37.3,61.3 39,59.6 C30.2 40.05,57.5 S1.1@39.96,57.41 ; P3.2 39.96,49.9 S1.1@39.96,51.06
  Bottom Layer w0.203: S1.1@39.96,51.06 S1.1@39.96,57.41
SPI_MISO: U1.9 U4.12 | length 25.5
  Component Side w0.203: U1.9 15.35,48.45 17.53,46.27 19.87,46.27 22.3,48.7 22.3,53.5 23.06,54.26 23.06,56.76 24.1,57.8 25.6,57.8 27.333,56.067 27.333,56.1 U4.12
SPI_MOSI: U1.7 U4.13 | length 29.6
  Component Side w0.203: U1.7 12.3,45 12.429,44.871 13.671,44.871 14.3,45.5 21,45.5 22.9,47.4 22.9,53.2 23.391,53.691 23.391,56.271 24.319,57.2 25.7,57.2 27.6,55.3 U4.13
SPI_SCK: U1.8 U4.11 | length 28.2
  Component Side w0.203: U1.8 12.8,45.94 20.34,45.94 v1(21.8,47.4) ; v1(21.7,49.3) 21.7,53.7 22.6,54.6 22.6,57 23.9,58.3 25.7,58.3 27.1,56.9 U4.11
  Bottom Layer w0.203: v1(21.7,49.3) 21.8,49.2 v1(21.8,47.4)
SWCLK: P3.3 U4.24 | length 4.6
  Component Side w0.203: U4.24 35.3,49.975 v1(35.45,49.975)
  Bottom Layer w0.203: P3.3 34.82,49.345 v1(35.45,49.975)
SWDIO: P3.4 U4.23 | length 5.1
  Component Side w0.203: v1(34.5,50.025) U4.23
  Bottom Layer w0.203: P3.4 32.28,47.805 v1(34.5,50.025)
TMP_ALERT: R6.1 U4.27 U5.3 | length 18.1
  Component Side w0.203: U4.27 37.8,54.5 38.65,53.65 40.45,53.65 41.65,52.45 43.15,52.45 43.75,51.85 43.75,50.35 46.621,47.479 46.621,47.405 46.927,47.1 47.848,47.1 ; R6.1 47.85,47.098 47.848,47.1 ; U5.3@49.6,47.7 49.6,47.403 49.297,47.1 47.848,47.1
USART1_RX: P4.4 U4.20 | length 8.5
  Component Side w0.203: U4.20 32.1,49.2 31.251,48.351 31.251,45.329 P4.4
USART1_TX: P4.3 U4.19 | length 11
  Component Side w0.203: U4.19 31.3,49 30.825,48.525 30.825,45.075 31.375,44.525 31.375,42.665 P4.3
USER_IO1: P4.5 U4.21 | length 11
  Component Side w0.203: U4.21 32.9,48.975 33.4,48.475 33.4,45.05 33.875,44.575 33.875,42.705 P4.5
USER_IO2: P4.6 U4.22 | length 8.1
  Component Side w0.203: U4.22 33.73,51.445 33.73,45.39 P4.6
pads on no net: P4.11 P4.12 U1.10 U1.16 U3.4 U4.3 U4.8 U4.9 U6.C2

## Polygon pours and split planes (outlines as drawn)
GND on Component Side "Bottom Layer-No Net" (solid, remove dead copper, pour order 5): 0.2,68 51.3,68 51.3,9 0.2,9 0.2,68
GND on Bottom Layer "Bottom Layer-No Net" (solid, pour order 4): 0.2,68 51.3,68 51.3,9 0.2,9 0.2,68

## Other copper
Component Side:
  region net NetC16_2: 16,66.15 16,65.425 16.15,65.275 16.15,65.55
  region net NetC16_2: 17,66.15 17,65.425 16.85,65.275 16.85,65.55
  region net NetC14_2: 13.4,62.05 13.075,62.05 12.725,61.7 13.075,61.35 13.4,61.35
  region net NetU1_18: 12.15,56.05 12.15,55.975 12.2,55.925 12.4,55.925 12.45,55.975 12.45,56.05
  region net NetU1_19: 11.65,56.05 11.65,55.975 11.7,55.925 11.9,55.925 11.95,55.975 11.95,56.05
  region net NetU1_20: 11.15,56.05 11.15,55.975 11.2,55.925 11.4,55.925 11.45,55.975 11.45,56.05
  region net NetL1_2: 12.65,56.05 12.65,55.975 12.7,55.925 12.9,55.925 12.95,55.975 12.95,56.05

## Silkscreen, mask and mechanical layers (free items; w line width, h text height)
Top Solder:
  rectangle: 15.4,61.25 16.125,62.15
  rectangle: 12.75,62.375 15.75,67.75
Mechanical 1:
  circle w0.01: c10.5,15.215 r1.75
  circle w0.01: c41,15.215 r1.75
  circle w0.01: c41,65.485 r1.75
  circle w0.01: c10.5,65.485 r1.75
  lines w0.01: 8,4.49 ccw(c4.49,4.49) 4.49,8 0,8 0,72.685 4.495,72.685 ccw(c4.495,76.195) 8.005,76.195 8.005,80.7 8,80.7 43.5,80.7 43.5,76.205 ; 8,4.495 8,0 43.5,0 43.5,4.49 cw(c47.01,4.49) 47.01,8 ; 43.5,76.21 ccw(c47.01,76.21) 47.01,72.7 ; 47.005,8 51.5,8 51.5,72.7 51.5,72.695 47.01,72.695

## Text inside footprints (layer, text, board x,y; h text height)
P4: Top Overlay "13" at 47.372,40.892 h1.27; Top Overlay "14" at 47.372,43.432 h1.27; Top Overlay "1" at 27.052,40.892 h1.27; Top Overlay "2" at 27.052,43.432 h1.27